# Altium PCB afstandbediening.PcbDoc (part 2 of 2)
Units mm, origin at the board's own origin, x right, y up, seen from the top; angles counter-clockwise.
Board outline 97 x 86 mm, 2 copper layers (Top Layer, Bottom Layer), stack 1.671 mm thick; 45 components, 45 nets, 242 pads, 62 vias.
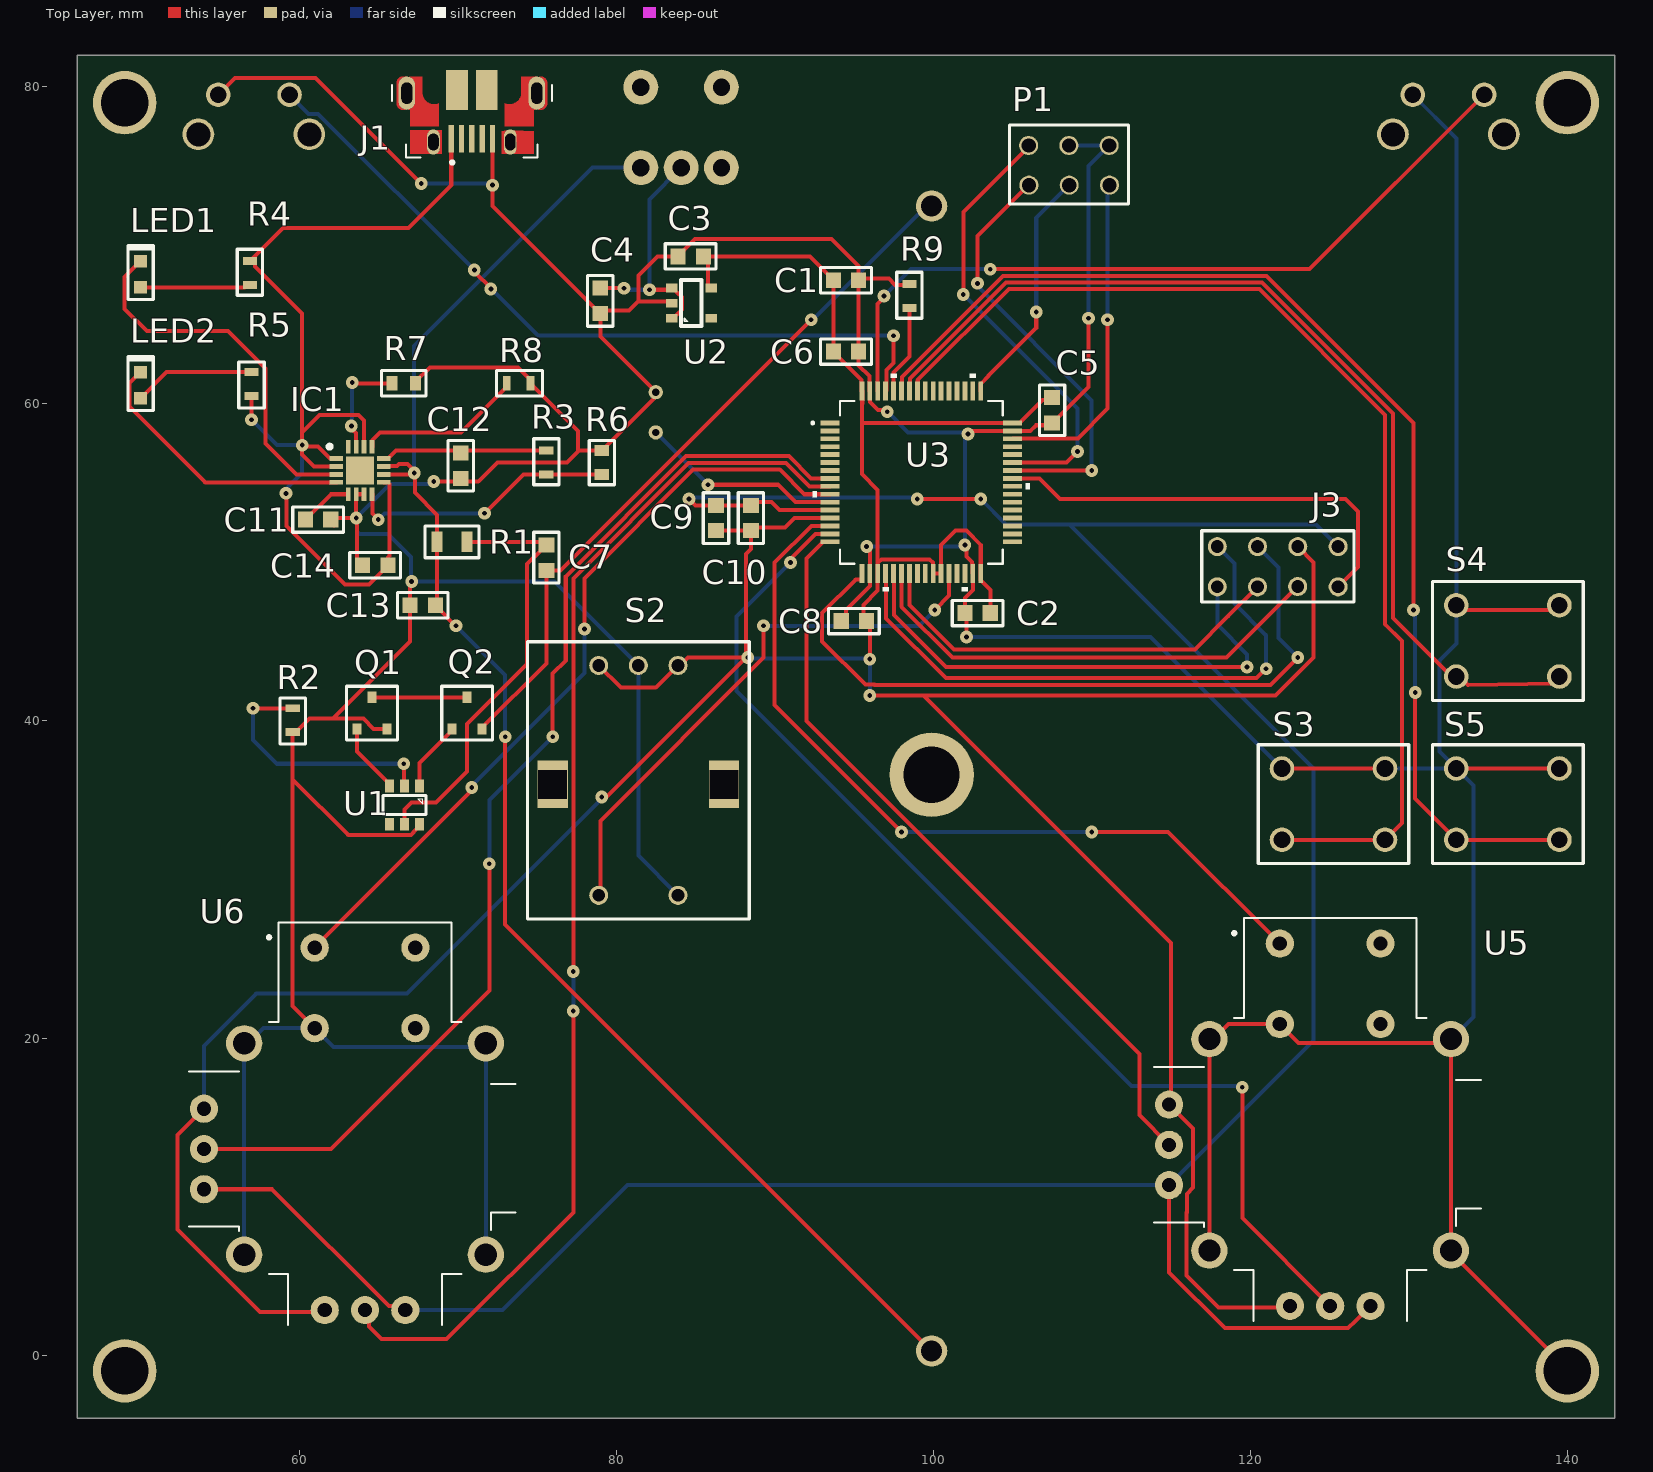
[diagram p0: Top Layer view]

## Part data (continued)
R9: library part ERJ-2RKF4991X, "Res Thick Film 0402 4.99K Ohm 1% 1/10W +/-100ppm/ßC Molded SMD Punched Carrier T/R", Case Code (Imperial)=0402, Case Code (Metric)=1005, Manufacturer=Panasonic, Max Operating Temperature=155°C, Max Power Dissipation=100mW, Min Operating Temperature=-55°C, Package Quantity=1, Resistance=4.99kR, Resistance Tolerance=1%, Resistor Type="Thick Film", Supplier Part Number 1=2059145, Temperature Coefficient=100ppm/°C, Voltage Rating=50V, Case/Package=0402, Category="Chip SMD Resistors", ComponentLink1Description=https://datasheet.ciiva.com/16773/70260748-16773110.pdf?src-supplier=Allied+Electronics, ComponentLink1URL=https://datasheet.ciiva.com/16773/70260748-16773110.pdf?src-supplier=Allied+Electronics, ComponentLink2Description=https://datasheet.ciiva.com/22749/1678782-22749654.pdf?src-supplier=Element14, ComponentLink2URL=https://datasheet.ciiva.com/22749/1678782-22749654.pdf?src-supplier=Element14, ComponentLink3Description=https://datasheet.ciiva.com/24158/aoa0000ce2-24158871.pdf?src-supplier=Mouser, ComponentLink3URL=https://datasheet.ciiva.com/24158/aoa0000ce2-24158871.pdf?src-supplier=Mouser, ComponentLink4Description=https://datasheet.ciiva.com/46388/426256-46388311.pdf?src-supplier=Element14, ComponentLink4URL=https://datasheet.ciiva.com/46388/426256-46388311.pdf?src-supplier=Element14, ComponentLink5Description=https://datasheet.ciiva.com/16199/aoa0000ce2-16199546.pdf?src-supplier=Future+Electronics, ComponentLink5URL=https://datasheet.ciiva.com/16199/aoa0000ce2-16199546.pdf?src-supplier=Future+Electronics, ComponentLink6Description=https://datasheet.ciiva.com/16775/70260748-16775018.pdf?src-supplier=Allied+Electronics, ComponentLink6URL=https://datasheet.ciiva.com/16775/70260748-16775018.pdf?src-supplier=Allied+Electronics, ComponentLink7Description=https://datasheet.ciiva.com/46376/426256-46376955.pdf?src-supplier=Element14, ComponentLink7URL=https://datasheet.ciiva.com/46376/426256-46376955.pdf?src-supplier=Element14, ComponentLink8Description=https://datasheet.ciiva.com/48530/aoa0000ce2-48530971.pdf?src-supplier=Avnet, ComponentLink8URL=https://datasheet.ciiva.com/48530/aoa0000ce2-48530971.pdf?src-supplier=Avnet, Construction=Rectangular, Contact Plating=Tin, Depth=0.5mm, Features="Automotive AEC-Q200", Height=0.016inch, Lead Free="Lead Free", Length=1mm, Manufacturer Part Number=ERJ-2RKF4991X, Military Standard=Not, Mount="Surface Mount", Number of Terminations=2, Packaging="Tape and Reel", Power Rating=100mW, Pricing 1="10=0.01960, 100=0.00930, 500=0.00630, 2500=0.00570, 5000=0.00530, 10000=0.00490, 50000=0.00440 (EUR)", Radiation Hardening=No, REACH SVHC="No SVHC", RoHS=Yes, RoHS Compliant=Yes, Series=ERJ, Stock 1=164767, Supplier 1=Farnell, Technology="THICK FILM", Termination=SMD/SMT, Tolerance=1%, Voltage Rating (DC)=50V, Weight=2.8E-05oz, Width=0.02inch, Working Voltage=50V
S1: library part T101MH9ABE, "SWITCH TOGGLE SPDT 0.4VA 20V", Actuator Color=Chrome, Contact Current Rating=400mA, Contact Resistance=20mR, Current Rating=20mA, Manufacturer="ITT C&K", Max Operating Temperature=85°C, Max Voltage Rating (AC)=20V, Min Operating Temperature=-30°C, Package Quantity=1, Power Rating=400mW, Supplier Part Number 1=9575685, Actuator Length=5.33mm, Actuator Material=Brass,Chrome, Actuator Type="Standard Round", Category="Toggle Switches", ComponentLink1Description=https://datasheet.ciiva.com/7986/49548-7986817.pdf?src-supplier=Element14, ComponentLink1URL=https://datasheet.ciiva.com/7986/49548-7986817.pdf?src-supplier=Element14, ComponentLink2Description=https://datasheet.ciiva.com/19467/595956-19467316.pdf?src-supplier=Jameco, ComponentLink2URL=https://datasheet.ciiva.com/19467/595956-19467316.pdf?src-supplier=Jameco, ComponentLink3Description=https://datasheet.ciiva.com/18143/getdatasheetpartid-116123-18143142.pdf?src-supplier=Verical, ComponentLink3URL=https://datasheet.ciiva.com/18143/getdatasheetpartid-116123-18143142.pdf?src-supplier=Verical, ComponentLink4Description=https://datasheet.ciiva.com/2906/t-toggle-29jul14-2906940.pdf?src-supplier=Digi-Key, ComponentLink4URL=https://datasheet.ciiva.com/2906/t-toggle-29jul14-2906940.pdf?src-supplier=Digi-Key, ComponentLink5Description=https://datasheet.ciiva.com/7986/1695318-7986815.pdf?src-supplier=Element14, ComponentLink5URL=https://datasheet.ciiva.com/7986/1695318-7986815.pdf?src-supplier=Element14, Contact Material="Gold,Copper Alloy", Contact Plating=Gold,Nickel, Electrical Life=60000Cycles, Height=5mm, Housing Material="Stainless Steel", Illumination Type=Non-Illuminated,Illuminated, Lead Free="Lead Free", Length=8.13mm, Manufacturer Part Number=T101MH9ABE, Max Voltage Rating (DC)=20V, Mount="Through Hole,Brackets,PCB", Number of Poles=1, Orientation="Right Angle", Packaging=Bulk, Pricing 1="1=5.00000, 5=4.75000, 10=4.50000, 20=4.30000, 50=4.09000 (EUR)", Radiation Hardening=No, REACH SVHC="No SVHC", RoHS=Yes, RoHS Compliant=Yes, Series=T, Stock 1=304, Supplier 1=Farnell, Switch Function=On-On, Termination="PC Pins", Throw Configuration=SPDT, Voltage Rating (AC)=20V, Voltage Rating (DC)=20V, Width=8.1mm
S2: library part EC11E15244B2, "ALPS - EC11E15244B2 - ENCODER, VERTICAL, 11MM, 30DET,15PPR", Case/Package=Metal, Manufacturer="Alps Electric", Max Operating Temperature=85°C, Max Supply Voltage (AC)=5V, Min Operating Temperature=-40°C, Package Quantity=1200, Supplier Part Number 1=2064991, Built in Switch=Yes, Category=Encoders, ComponentLink1Description=https://datasheet.ciiva.com/11807/0900766b80f4c221-11807911.pdf?src-supplier=RSComponents, ComponentLink1URL=https://datasheet.ciiva.com/11807/0900766b80f4c221-11807911.pdf?src-supplier=RSComponents, ComponentLink2Description=https://datasheet.ciiva.com/18154/getdatasheetpartid-652491-18154142.pdf?src-supplier=Verical, ComponentLink2URL=https://datasheet.ciiva.com/18154/getdatasheetpartid-652491-18154142.pdf?src-supplier=Verical, ComponentLink3Description=https://datasheet.ciiva.com/1310/1702859-1310642.pdf?src-supplier=Element14, ComponentLink3URL=https://datasheet.ciiva.com/1310/1702859-1310642.pdf?src-supplier=Element14, Hole Diameter=1.5mm, Manufacturer Part Number=EC11E15244B2, Mount="Through Hole", Nominal Supply Voltage (DC)=5V, Number of Channels=2, Number of Pins=5, Packaging=Tray, Pricing 1="1=4.11000, 5=3.45000, 10=3.19000, 20=2.97000, 50=2.83000 (EUR)", Pulses per Revolution=15, Radiation Hardening=No, RoHS=Yes, RoHS Compliant=Yes, Stock 1=1927, Supplier 1=Farnell, Termination="Through Hole"
S3 S4 S5: library part B3F-1070, "Switch Tactile N.O. SPST Flat Plunger PC Pins 0.05A 24VDC 0.98N Thru-Hole Bag", Actuator Color=Black, Contact Current Rating=50mA, Contact Resistance=100mR, Insulation Resistance=100MR, Manufacturer=Omron, Max Operating Temperature=70°C, Max Voltage Rating (DC)=24V, Min Operating Temperature=-25°C, Operating Force=0.98N, Package Quantity=1000, Supplier Part Number 1=959698, Actuator Length=6.1mm, Actuator Type=Standard, Category="Tactile Switches", ComponentLink1Description=https://datasheet.ciiva.com/14540/70175474-14540918.pdf?src-supplier=Allied+Electronics, ComponentLink1URL=https://datasheet.ciiva.com/14540/70175474-14540918.pdf?src-supplier=Allied+Electronics, ComponentLink2Description=https://datasheet.ciiva.com/2899/en-b3f-2899915.pdf?src-supplier=Digi-Key, ComponentLink2URL=https://datasheet.ciiva.com/2899/en-b3f-2899915.pdf?src-supplier=Digi-Key, ComponentLink3Description=https://datasheet.ciiva.com/14142/b3f-eng-datasheet-14142459.pdf?src-supplier=Distrelec, ComponentLink3URL=https://datasheet.ciiva.com/14142/b3f-eng-datasheet-14142459.pdf?src-supplier=Distrelec, ComponentLink4Description=https://datasheet.ciiva.com/26827/getdatasheetpartid-388866-26827340.pdf?src-supplier=Verical, ComponentLink4URL=https://datasheet.ciiva.com/26827/getdatasheetpartid-388866-26827340.pdf?src-supplier=Verical, ComponentLink5Description=https://datasheet.ciiva.com/20148/78-0136-20148405.pdf?src-supplier=Rapid+Electronics, ComponentLink5URL=https://datasheet.ciiva.com/20148/78-0136-20148405.pdf?src-supplier=Rapid+Electronics, ComponentLink6Description=https://datasheet.ciiva.com/16154/en-b3f-16154903.pdf?src-supplier=Onlinecomponents.com, ComponentLink6URL=https://datasheet.ciiva.com/16154/en-b3f-16154903.pdf?src-supplier=Onlinecomponents.com, ComponentLink7Description=https://datasheet.ciiva.com/5283/b3f-0811-26083-5283693.pdf?src-supplier=Mouser, ComponentLink7URL=https://datasheet.ciiva.com/5283/b3f-0811-26083-5283693.pdf?src-supplier=Mouser, ComponentLink8Description=https://datasheet.ciiva.com/15183/getdatasheetpartid-153449-15183757.pdf?src-supplier=Verical, ComponentLink8URL=https://datasheet.ciiva.com/15183/getdatasheetpartid-153449-15183757.pdf?src-supplier=Verical, Contact Material=Gold,Silver, Contact Plating=Silver,Gold, Current Rating=50mA, Depth=7.7mm, Electrical Life=1000000Cycles, Illumination Type=Non-Illuminated,Illuminated, Lead Free="Lead Free", Length=6mm, Manufacturer Part Number=B3F-1070, Max Current Rating=50mA, Mechanical Life=500000Cycles, Mount="Through Hole", Number of Poles=1, Orientation=Straight, Packaging=Bulk, Pricing 1="10=0.28600, 50=0.25600, 100=0.22600, 500=0.20900 (EUR)", REACH SVHC=Unknown, RoHS=Yes, RoHS Compliant=Yes, Series=B3F, Stock 1=5378, Supplier 1=Farnell, Switch Function=Off-Mom, Switch Travel=0.25mm, Termination="PC Pins", Throw Configuration=SPST, Voltage Rating (DC)=24V, Weight=0.25g
S6 S7: library part B3F-3120, "OMRON ELECTRONIC COMPONENTS         B3F3120            Tactile Switch, Non Illuminated, 0.98 N, 24 V, 50 mA, Solder, B3F Series", Actuator Color=Black, Contact Current Rating=50mA, Contact Resistance=100mR, Manufacturer=Omron, Max Operating Temperature=70°C, Max Voltage Rating (DC)=24V, Min Operating Temperature=-25°C, Operating Force=0.98N, Package Quantity=1000, Ratings=IP00, Supplier Part Number 1=1608275, Actuator Length=1.6mm, Actuator Type=Standard, Category="Keylock Switches", ComponentLink1Description=https://datasheet.ciiva.com/26883/getdatasheetpartid-569160-26883377.pdf?src-supplier=Verical, ComponentLink1URL=https://datasheet.ciiva.com/26883/getdatasheetpartid-569160-26883377.pdf?src-supplier=Verical, ComponentLink2Description=https://datasheet.ciiva.com/2900/b3f-0811-2900017.pdf?src-supplier=Digi-Key, ComponentLink2URL=https://datasheet.ciiva.com/2900/b3f-0811-2900017.pdf?src-supplier=Digi-Key, ComponentLink3Description=https://datasheet.ciiva.com/30263/en-b3f-30263926.pdf?src-supplier=Onlinecomponents.com, ComponentLink3URL=https://datasheet.ciiva.com/30263/en-b3f-30263926.pdf?src-supplier=Onlinecomponents.com, ComponentLink4Description=https://datasheet.ciiva.com/48509/b3f-48509416.pdf?src-supplier=Distrelec, ComponentLink4URL=https://datasheet.ciiva.com/48509/b3f-48509416.pdf?src-supplier=Distrelec, ComponentLink5Description=https://datasheet.ciiva.com/16154/en-b3f-16154921.pdf?src-supplier=Onlinecomponents.com, ComponentLink5URL=https://datasheet.ciiva.com/16154/en-b3f-16154921.pdf?src-supplier=Onlinecomponents.com, ComponentLink6Description=https://datasheet.ciiva.com/15183/getdatasheetpartid-153427-15183754.pdf?src-supplier=Verical, ComponentLink6URL=https://datasheet.ciiva.com/15183/getdatasheetpartid-153427-15183754.pdf?src-supplier=Verical, ComponentLink7Description=https://datasheet.ciiva.com/1532/611570-1532588.pdf?src-supplier=Element14, ComponentLink7URL=https://datasheet.ciiva.com/1532/611570-1532588.pdf?src-supplier=Element14, ComponentLink8Description=https://datasheet.ciiva.com/16859/70175475-16859533.pdf?src-supplier=Allied+Electronics, ComponentLink8URL=https://datasheet.ciiva.com/16859/70175475-16859533.pdf?src-supplier=Allied+Electronics, Contact Material=Gold,Silver, Contact Plating=Gold, Contact Type="1 maker", Current Rating=50mA, Depth=7.15mm, Electrical Life=1000000Cycles, Height=3.85mm, Illumination Type=Non-Illuminated,Illuminated, Lead Free="Lead Free", Length=7.3mm, Manufacturer Part Number=B3F-3120, Max Current Rating=50mA, Mechanical Life=1000000Cycles, Mount="Through Hole", Number of Poles=1, Orientation="Right Angle", Packaging=Bulk, Pricing 1="10=0.35800, 50=0.32000, 100=0.28200, 500=0.26300 (EUR)", Radiation Hardening=No, REACH SVHC=Unknown, RoHS=Yes, RoHS Compliant=Yes, Series=B3F, Stock 1=145, Supplier 1=Farnell, Switch Function=Off-Mom, Switch Travel=0.25mm, Termination="PC Pins", Throw Configuration=SPST, Voltage Rating (DC)=24V, Weight=0.25g, Width=6mm
U1: library part AP9101CK6-AETRG1, "IC BATT PROT LI-ION 1-CELL SOT26", Case/Package=SOT-23-6, Manufacturer=Diodes, Max Operating Temperature=85°C, Min Operating Temperature=-40°C, Supplier Part Number 1=621-AP9101CK6-AETRG1, Category="Battery Management", ComponentLink1Description=https://www.diodes.com/assets/Datasheets/AP9101C.pdf?src-supplier=Digi-Key, ComponentLink1URL=https://www.diodes.com/assets/Datasheets/AP9101C.pdf?src-supplier=Digi-Key, Fault Protection="Over Current,Over Voltage", Manufacturer Part Number=AP9101CK6-AETRG1, Number of Cells=1, Pricing 1="1=0.44000, 10=0.32300, 50=0.32300, 100=0.16500, 1000=0.12400, 10000=0.10700 (USD)", RoHS=Yes, RoHS Compliant=Yes, Stock 1=3466, Supplier 1=Mouser
U2: library part NCP164CSN300T1G, "MAX 5V, MIN 1.6V OUTPUT 3V", Manufacturer="ON Semiconductor", Supplier Part Number 1=3463950, Manufacturer Part Number=NCP164CSN300T1G, Pricing 1="1=0.39400, 50=0.32400, 100=0.25600, 250=0.23300, 500=0.22700, 1000=0.19200, 2500=0.17300, 5000=0.16700 (EUR)", RoHS=No, Stock 1=3000, Supplier 1=Farnell
U3: "No Description Available", Built_By=EMA_UL_Team, Copyright="Copyright (C) 2018 Accelerated Designs. All rights reserved", Manufacturer_Part_Number=STM32F303R8T6, RefDes=RefDes, SourceLibrary=Updates_to_database_2020-10-19, Type=DEV, Vendor=STMicroelectronics
U4: "Undefined or Miscellaneous", Manufacturer_Name="Keystone Electronics", Datasheet Link=http://www.keyelco.com/product-pdf.cfm?p=13958, Height=14mm, Manufacturer_Part_Number=1043P
U5 U6: "Joystick, 2 - Axis Analog _Resistive_ Output", Package="SparkFun Electronics", Availability=Unavailable, MF="SparkFun Electronics", MP=COM-09032, Price=None, SnapEDA_Link=https://www.snapeda.com/parts/COM-09032/SparkFun%20Electronics/view-part/888157/?ref=snap

## Free pads (board coordinates)
  round 4 / inner oval 1.2x0.3 / far side oval 1.2x0.3 hole 3: 2(49,-1) 2(49,79) 2(140,-1)
  round 4 hole 3: 2(140,79)

## Via types
v1: diameter 0.8, hole 0.3, Top Layer to Bottom Layer, 62 vias

## Nets (pads, with @x,y where several pads share a name; then routed paths per layer and width w, separated by ;. In a path a pad name is that pad's centre, name@x,y a point inside that pad or via, vN(x,y) a via of type N, cw(c..) or ccw(c..) an arc to the next point about the centre after c; other vN are vias at no path point)
GND: C1.1 C2.1 C3.2 C4.2 C5.1 C6.1 C8.1 C11.1 C12.1 C13.1 C14.1 IC1.6 IC1.7 J1.5 J4.2 P1.5 P1.6 pad.2@140,-1 Q1.2 R2.1 R6.1 R7.2 R8.1 R9.1 S2.3 S2.4 S3.3 S3.4 S4.3 S4.4 S5.3 S5.4 S6.1 S7.1 U1.6 U2.2 U3.18 U3.31 U3.47 U3.63 U5.B2A U5.S1 U5.S2 U5.S3 U5.S4 U6.B2A U6.S1 U6.S2 U6.S3 U6.S4 | length 468.8
  Top Layer w0.254: S6.1 55.97,80.57 61.03,80.57 v1(67.7,73.9) ; U6.B2A 59.6,22.005 59.6,36.3 ; C11.1@62.2,52.325 62.2,52.8 v1(63.6,52.8) ; v1@63.6,52.809 v1(63.6,52.8) ; v1@63.6,52.905 IC1.6 IC1.7 64.077,54.277 IC1.7@64.077,54.002 ; C14.1 63.652,50.173 63.652,52.748 v1(63.6,52.8) ; Q1.2 64.707,39.492 64.052,40.147 62.147,40.147 ; v1(67.1,48.8) 67,48.7 C13.1 67,45 62.147,40.147 ; R7.2 67.35,61.4 68.25,62.3 73.8,62.3 74.477,61.623 R8.1@74.6,61.5 ; U1.6 67.6,33.367 67.22,32.987 67.22,32.97 67.047,32.797 63.103,32.797 59.6,36.3 ; v1(68.5,55.1) 70,55.1 C12.1 ; C12.1@70.2,55.1 71.303,55.1 72.503,56.3 76.9,56.3 77.65,57.05 ; J1.5 v1(72.2,73.8) 72.2,72.475 78.975,65.7 C4.2 ; R8.1 77.6,58.3 77.6,57.05 77.65,57.05 ; R6.1@79,57.05 77.65,57.05 ; R6.1 79.2,57.05 79.423,57.273 79.423,57.373 82.376,60.326 82.376,60.616 J4.2 79,64.24 C4.2 ; U2.2 83.405,66.445 81.405,66.445 81.405,66.505 ; C8.1 94.503,46.603 94.503,47.003 96,48.5 U3.18 v1@96,50.657 ; v1(97.108,59.508) 97.004,59.613 96.521,59.613 96.025,60.108 96.025,60.775 U3.63 95.975,60.825 95.975,61.744 95.3,62.419 C6.1 C1.1 ; R9.1@98.5,67.5 97.6,67.5 97.2,67.9 95.4,67.9 C1.1 ; v1(102,51.1) 102.1,51 102.1,50.366 102.447,50.019 102.447,49.919 102.475,49.891 102.475,49.325 U3.31 102.5,48.264 102,47.764 C2.1 102.1,46.7 v1(102.1,45.3) ; v1(102.2,58.105) 102.2,58.151 102.349,58.3 U3.47 106.122,58.3 106.474,58.652 107.152,58.652 C5.1@107.4,58.9 ; C5.1 107.525,58.8 109.8,61.075 v1(109.8,65.4) ; U5.S2 U5.S1 117.67,19.927 118.623,20.88 U5.B2A 123.049,19.696 132.428,19.696 U5.S4 U5.S3 132.66,6.466 140,-0.874 pad.2@140,-1 ; S3.4 S3.3 ; S5.4 S5.3 ; S4.4@133,47 S4.3@140,47 ; 59.6,36.3 R2.1 59.8,39.3 60.647,40.147 62.147,40.147 ; C4.2 79.2,65.9 80.8,65.9 81.405,66.505 ; 81.405,66.505 81.405,68.105 82.6,69.3 C3.2 83.9,69.325 84.975,70.4 93.6,70.4 95.3,68.7 95.3,67.9 C1.1
  Bottom Layer w0.254: U6.S2 U6.S1 56.79,19.667 57.743,20.62 U6.B2A 62.169,19.436 71.549,19.436 U6.S4 U6.S3 ; v1(67.7,73.9) 72.1,73.9 v1(72.2,73.8) ; v1@68.274,55.1 68.118,54.944 65.744,54.944 v1(63.6,52.8) 63.664,52.736 63.664,51.949 63.812,51.8 65.6,51.8 67.052,50.348 67.052,48.848 v1(67.1,48.8) 76.1,48.8 S2.3 81.4,31.5 S2.4 ; v1(95.8,51) 101.9,51 v1(102,51.1) 102,57.852 102.2,58.052 v1(102.2,58.105) 102.2,58.2 98.416,58.2 v1(97.108,59.508) ; v1(102.1,45.3) 113.7,45.3 S3.4 ; P1.5 P1.6 109.8,75 v1(109.8,65.4) ; S3.3 S5.4 ; S7.1 133,76.75 S4.4 133,44.888 131.93,43.818 131.93,38.07 S5.4 ; U5.S4 134.07,21.338 134.07,35.93 S5.4
NetC1_2: C1.2 C2.2 C3.1 C5.2 C6.2 C8.2 C9.2 C10.2 J3.7 S2.1 S2.2 U2.5 U3.13 U3.19 U3.26 U3.27 U3.32 U3.48 U3.64 U5.H1 U5.V1 U6.H1 U6.V1 | length 261.3
  Top Layer w0.254: U6.V1 52.335,13.875 52.335,7.92 57.53,2.725 61.505,2.725 U6.H1 ; S2.2 80.3,42.1 82.5,42.1 S2.1 84.022,43.5 84.522,44 v1@88.2,44 ; v1(79.1,35.2) 79.4,35.2 v1@88.2,44 ; U2.5 85.953,67.3 85.8,67.453 85.8,69 C3.1 92.225,69.3 93.7,67.825 C6.2@93.7,63.325 ; C9.2 C10.2@88.3,52 ; v1(88.295,44) v1@88.2,44 ; U3.13 91.264,52.8 90.664,52.2 88.5,52.2 C10.2@88.3,52 ; C6.2@93.7,63.275 95.475,61.5 95.475,60.825 U3.64 ; C6.2 C6.2@93.7,63.325 ; C1.2 C6.2@93.7,63.325 ; 95.525,60.011 95.525,60.775 U3.64 ; C8.2@95.6,46.3 95.6,47.314 96.5,48.214 U3.19 96.5,54.563 95.5,55.563 95.5,58.7 ; C8.2 96,46.1 v1(96,43.9) ; v1(96,41.6) 99.4,41.6 ; 96.553,50.019 96.725,50.192 99.775,50.192 99.975,49.992 99.975,49.325 U3.26 U3.27 100.5,51.1 101.4,52 102.1,52 103,51.1 U3.32 103,48.906 102.975,48.881 103.6,48.256 C2.2 ; C5.2@107.5,60.6 107.152,60.252 106.896,60.252 105.444,58.8 U3.48 95.6,58.8 95.5,58.7 ; U5.H1 122.4,3 118,3 115.982,5.018 115.982,8.982 116,9 116,10.166 116.4,10.566 116.4,14.28 U5.V1 115,15.92 115,26 99.4,41.6 ; J3.7 124,50 124,44 121.6,41.6 99.4,41.6 ; v1@88.2,44 88.2,50.545 88.5,50.845 C10.2 C10.2@88.3,52 ; 95.5,58.7 U3.64
  Bottom Layer w0.254: U6.V1 54,19.5 57.3,22.8 66.8,22.8 v1@78.896,34.896 ; S2.1 S2.1@84.022,43.5 ; v1(88.295,44) 88.4,44 88.45,43.95 95.95,43.95 v1(96,43.9) v1(96,41.6)
NetC4_1: C4.1 S1.2 U2.1 U2.3 | length 15.8
  Top Layer w0.254: C4.1@78.975,67.3 C4.1 v1(80.5,67.3) ; v1(82.1,67.2) 83.3,67.2 83.49,67.39 83.948,66.932 83.975,66.932 84.155,66.752 84.155,65.948 83.982,65.775 83.955,65.775 83.58,65.4 U2.1
  Bottom Layer w0.254: v1(80.5,67.3) 80.6,67.2 v1(82.1,67.2) 82.1,72.9 S1.2
NetC7_1: C7.1 Q2.2 U4.2 | length 45.5
  Top Layer w0.254: Q2.2 71.55,39.572 75.6,43.622 C7.1 76.5,49.5 v1(92.3,65.3)
  Bottom Layer w0.254: v1(92.3,65.3) 92.4,65.3 99.58,72.48 U4.2
NetC7_2: C7.2 R1.1 U1.5 | length 27.3
  Top Layer w0.254: U1.5 66.65,34.4 67.1,34.85 68.65,34.85 70.6,36.8 70.6,39.8 74.386,43.586 74.386,49.886 75.227,50.727 75.227,50.752 75.575,51.1 C7.2 75.4,51.3 R1.1
NetC9_1: C9.1 C10.1 J3.8 U3.12 U5.H3 U5.V3 U6.H3 U6.V3 | length 190.9
  Top Layer w0.254: U6.V3 58.295,10.46 65.663,3.092 66.448,3.092 U6.H3 ; v1(84.6,54) 85,53.6 C9.1 C10.1 ; C10.1@88.5,53.8 89.794,53.8 90.294,53.3 U3.12 ; v1(99,54) v1(103,54) ; U5.V3 114.88,5.22 118.4,1.7 126.18,1.7 126.644,2.164 U5.H3
  Bottom Layer w0.254: U6.H3 72.84,2.84 80.72,10.72 U5.V3 124,19.84 124,37 117.565,43.435 108.6,52.4 ; v1(84.6,54) 84.7,54.1 98.9,54.1 v1(99,54) ; v1(103,54) 104.6,52.4 108.6,52.4 ; J3.8 124.14,52.4 108.6,52.4
NetC11_2: C11.2 IC1.5 | length 3.4
  Top Layer w0.254: C11.2 62,54.3 62.575,54.3 IC1.5
NetC12_2: C12.2 IC1.12 R3.1 | length 10.5
  Top Layer w0.254: IC1.12 65.625,56.55 66.125,57.05 69.25,57.05 69.75,57.05 70.2,57.05 R3.1
NetC13_2: C13.2 IC1.10 IC1.11 R1.2 S1.1 U4.1 | length 100.2
  Top Layer w0.254: IC1.10 67.172,55.55 v1(67.261,55.639) ; IC1.11 65.373,56.073 66.173,56.073 66.3,56.2 66.848,56.2 67.261,55.787 v1(67.261,55.639) ; v1(69.9,46) 69.875,46 68.6,47.275 C13.2 68.7,47.4 R1.2 68.7,53 67.3,54.4 67.3,55.6 v1(67.261,55.639) ; v1(73,39) 73,27.16 U4.1
  Bottom Layer w0.254: v1(67.261,55.639) 67.261,63.661 78.5,74.9 S1.1 ; v1(69.9,46) 73,42.9 v1(73,39)
NetC14_2: C14.2 IC1.1 IC1.2 IC1.9 IC1.14 J1.1 R4.1 R5.1 | length 67.1
  Top Layer w0.254: v1(57,59) R5.1 ; v1@59.09,54.628 59.09,54.437 v1(59.173,54.355) ; v1@59.2,54.355 59.2,52.308 62.908,48.6 64.4,48.6 65.6,49.8 C14.2 ; IC1.2 60.95,56.05 60.2,56.8 60.2,57.3 v1(60.2,57.4) ; IC1.1 62.327,56.573 61.927,56.573 61.2,57.3 60.3,57.3 v1(60.2,57.4) ; IC1.14 64.1,58.951 63.751,59.3 61.3,59.3 60.2,58.2 ; IC1.9 65.577,55.05 65.695,54.932 65.695,50.395 C14.2@65.6,50.3 ; J1.1 69.6,73.8 66.9,71.1 59,71.1 R4.1 57.1,69 57.223,68.877 57.223,68.677 60.2,65.7 60.2,58.2 ; v1(60.2,57.4) 60.2,58.2
  Bottom Layer w0.254: v1(57,59) 58.6,57.4 v1(60.2,57.4) 60.2,55.65 59.173,54.623 v1(59.173,54.355)
NetIC1_3: IC1.3 LED1.1 | length 23.9
  Top Layer w0.254: LED1.1 49,68 49,66 50.4,64.6 55.517,64.6 57.894,62.223 57.894,57.506 59.85,55.55 IC1.3
NetIC1_4: IC1.4 LED2.1 | length 17.6
  Top Layer w0.254: LED2.1@50.069,61.931 LED2.1 49.305,61.305 49.305,59.828 54.083,55.05 IC1.4
NetIC1_8: IC1.8 R3.2 R6.2 | length 17
  Top Layer w0.254: IC1.8 64.623,54.277 64.623,53.077 v1(65,52.7) ; v1(71.7,53.1) 74.15,55.55 R3.2 R6.2
  Bottom Layer w0.254: v1(65,52.7) 65.4,53.1 v1(71.7,53.1)
NetIC1_13: IC1.13 R8.2 | length 10.5
  Top Layer w0.254: IC1.13 64.623,57.323 64.623,57.723 65.1,58.2 70.2,58.2 72.977,60.977 73.1,61.1 R8.2
NetIC1_15: IC1.15 R7.1 | length 6.7
  Top Layer w0.254: v1(63.3,58.6) 63.3,58.452 63.6,58.152 IC1.15 ; v1(63.35,61.35) 63.4,61.3 R7.1
  Bottom Layer w0.254: v1(63.3,58.6) 63.35,58.65 v1(63.35,61.35)
NetJ3_1: J3.1 U3.41 | length 27.9
  Top Layer w0.254: U3.41 106.7,55.3 108,54 126,54 126.8,53.2 126.8,49.72 J3.1
NetJ3_2: J3.2 U3.22 | length 30.3
  Top Layer w0.254: U3.22 98,47.203 101.203,44 118.51,44 J3.2
NetJ3_3: J3.3 U3.23 | length 26.8
  Top Layer w0.254: U3.23 98.5,47.3 101.3,44.5 116.5,44.5 118.58,46.58 J3.3
NetJ3_4: J3.4 U3.21 | length 32.1
  Top Layer w0.254: U3.21 97.525,49.275 97.525,46.675 100.8,43.4 v1(119.8,43.4)
  Bottom Layer w0.254: J3.4 117.92,46.08 119.8,44.2 v1(119.8,43.4)
NetJ3_5: J3.5 U3.20 | length 37.6
  Top Layer w0.254: U3.20 97.025,49.275 97.025,46.475 100.795,42.705 120.405,42.705 v1(121,43.3)
  Bottom Layer w0.254: J3.5 119,49.92 119,47.406 121,45.406 v1(121,43.3)
NetJ3_6: J3.6 U3.17 | length 45.4
  Top Layer w0.254: U3.17 95.5,48.941 95.475,48.915 95.115,48.915 93,46.8 93,45.017 95.722,42.295 96.288,42.295 96.305,42.278 121.278,42.278 v1(123,44)
  Bottom Layer w0.254: J3.6 121.768,49.692 121.768,45.232 v1(123,44)
NetJ4_1: J4.1 U3.11 | length 12.8
  Top Layer w0.254: v1(85.8,54.9) 90.206,54.9 91.306,53.8 U3.11
  Bottom Layer w0.254: J4.1 v1(85.8,54.9)
NetLED1_2: LED1.2 R4.2 | length 7
  Top Layer w0.254: LED1.2 56.55,67.35 56.7,67.5 R4.2
NetLED2_2: LED2.2 R5.2 | length 7.7
  Top Layer w0.254: LED2.2 51.65,62 R5.2
NetP1_1: P1.1 U3.46 | length 20.9
  Top Layer w0.254: U3.46 105.025,57.825 109.125,57.825 111,59.7 v1(111,65.3)
  Bottom Layer w0.254: v1(111,65.3) 111,73.7 P1.1@111.1,73.8
NetP1_2: P1.2 U3.49 | length 15.3
  Top Layer w0.254: U3.49 103,61.244 103.5,61.744 103.5,61.8 106.5,64.8 v1(106.5,65.8) ; P1.2 P1.2@108.62,73.8
  Bottom Layer w0.254: v1(106.5,65.8) 106.5,71.74 P1.2@108.56,73.8
NetP1_3: P1.3 U3.42 | length 27.3
  Top Layer w0.254: v1(102.8,67.6) 102.8,70.58 P1.3@106.02,73.8 ; U3.42 v1(110,55.8)
  Bottom Layer w0.254: v1(102.8,67.6) 102.8,67.426 110,60.226 v1(110,55.8)
NetP1_4: P1.4 U3.43 | length 28.4
  Top Layer w0.254: v1(101.9,66.9) 101.9,72.1 106,76.2 P1.4@106,76.3 ; U3.43 108.4,56.3 v1(109.1,57)
  Bottom Layer w0.254: v1(101.9,66.9) 109.1,59.7 v1(109.1,57)
NetQ1_1: Q1.1 U1.3 | length 4.4
  Top Layer w0.254: Q1.1 63.65,38.067 65.7,36.017 U1.3
NetQ1_3: Q1.3 Q2.3 | length 6
  Top Layer w0.254: Q1.3 Q2.3
NetQ2_1: Q2.1 U1.1 | length 4.4
  Top Layer w0.254: U1.1 67.6,37.362 69.65,39.412 Q2.1
NetR2_2: R2.2 U1.2 | length 16.1
  Top Layer w0.254: v1(57.1,40.8) R2.2 ; v1(66.6,37.3) 66.625,37.275 66.625,35.917 U1.2
  Bottom Layer w0.254: v1(57.1,40.8) 57.1,38.8 58.6,37.3 v1(66.6,37.3)
NetR9_2: R9.2 U3.60 | length 5.7
  Top Layer w0.254: U3.60 97.5,61.985 98.5,62.985 R9.2
NetS2_5: S2.5 U3.28 | length 35.6
  Top Layer w0.254: S2.5@78.6,28.8 S2.5@79,28.8 ; S2.5 79,29.1 79,33.7 89.3,44 v1(89.3,46) ; v1(100.1,47.005) 101,47.905 U3.28
  Bottom Layer w0.254: v1(89.3,46) 99.095,46 v1(100.1,47.005)
NetS3_1: S3.1 S3.2 U3.57 | length 70
  Top Layer w0.254: U3.57 99.025,60.825 99.025,61.492 104.768,67.234 120.569,67.234 128.5,59.303 128.5,46.1 129.57,45.03 129.57,33.57 S3.1 S3.2
NetS4_1: S4.1 S4.2 U3.58 | length 62.1
  Top Layer w0.254: U3.58 98.525,60.825 98.525,61.589 104.593,67.656 120.744,67.656 129,59.4 129,46.5 S4.2@133,42.5 ; S4.2@133.4,42.6 133.739,42.261 139.36,42.36 S4.1@139.5,42.5
NetS5_1: S5.1 S5.2 U3.59 | length 73.6
  Top Layer w0.254: U3.59 98.025,60.825 98.025,61.685 104.418,68.078 121.022,68.078 130.3,58.8 v1(130.3,47) ; v1(130.4,41.8) 130.4,35.1 S5.2 S5.1
  Bottom Layer w0.254: v1(130.3,47) 130.4,46.9 v1(130.4,41.8)
NetS6_2: S6.2 U3.61 | length 48.5
  Top Layer w0.254: S6.2 S6.2@59.648,79.252 ; v1(71.059,68.441) 71.1,68.4 71.1,68.3 72.1,67.3 v1(72.1,67.25) ; U3.61 97.053,60.853 97.053,62.134 97.5,62.581 v1(97.5,64.3)
  Bottom Layer w0.254: S6.2 60.605,78.295 61.205,78.295 v1(71.059,68.441) ; v1(72.1,67.25) 72.125,67.25 75.075,64.3 v1(97.5,64.3)
NetS7_2: S7.2 U3.62 | length 49.3
  Top Layer w0.254: U3.62 96.5,66.3 96.9,66.7 v1(96.9,66.8) ; v1(103.6,68.5) 123.75,68.5 S7.2
  Bottom Layer w0.254: v1(96.9,66.8) 98.6,68.5 v1(103.6,68.5)
NetU3_8: U3.8 U6.V2 | length 70.7
  Top Layer w0.254: U6.V2 62,13 72,23 v1(72,31) ; v1(76,39) 76,42.983 76.823,43.806 76.823,49.123 84.4,56.7 90.897,56.7 92.297,55.3 U3.8
  Bottom Layer w0.254: v1(72,31) 72,35 v1(76,39)
NetU3_9: U3.9 U6.H2 | length 77.5
  Top Layer w0.254: U6.H2 64.404,2.596 64.404,1.796 65.2,1 69.3,1 77.3,9 v1(77.3,21.7) ; v1(77.3,24.2) 77.3,49 84.578,56.278 90.722,56.278 92.2,54.8 93.449,54.8 93.475,54.825 U3.9
  Bottom Layer w0.254: v1(77.3,21.7) v1(77.3,24.2)
NetU3_10: U3.10 U6.B1A | length 49.3
  Top Layer w0.254: U6.B1A 70.796,35.511 70.796,35.696 v1(70.9,35.8) ; v1(78,45.8) 78,49 84.856,55.856 90.322,55.856 91.878,54.3 U3.10
  Bottom Layer w0.254: v1(70.9,35.8) 70.9,35.917 78,43.017 v1(78,45.8)
NetU3_14: U3.14 U5.B1A | length 51.5
  Top Layer w0.254: U3.14 92.317,52.3 90,49.983 90,41 v1(98,33) ; v1(110,33) 114.825,33 U5.B1A
  Bottom Layer w0.254: v1(98,33) v1(110,33)
NetU3_15: U3.15 U5.H2 | length 71.3
  Top Layer w0.254: v1(91,50) 91,50.229 92.571,51.8 U3.15 ; v1(119.5,16.9) 119.5,8.64 U5.H2 U5.H2@125.04,3.04
  Bottom Layer w0.254: v1(91,50) 87.6,46.6 87.6,41.9 112.516,16.984 119.416,16.984 v1(119.5,16.9)
NetU3_16: U3.16 U5.V2 | length 48.4
  Top Layer w0.254: U3.16 93.056,51.3 92,50.244 92,40 113,19 113,15.14 U5.V2
pads on no net: IC1.16 IC1.17 J1.2 J1.3 J1.4 J1.P1 J1.P2 J1.P3 J1.P4 J1.P5 J1.P6 S1.3 S1.4 S1.5 S2.6 S2.7 S6.3 S6.4 S7.3 S7.4 U1.4 U2.4 U3.1 U3.2 U3.3 U3.4 U3.5 U3.6 U3.7 U3.24 U3.25 U3.29 U3.30 U3.33 U3.34 U3.35 U3.36 U3.37 U3.38 U3.39 U3.40 U3.44 U3.45 U3.50 U3.51 U3.52 U3.53 U3.54 U3.55 U3.56 U4.3 U5.B1B U5.B2B U6.B1B U6.B2B
copper on no net: | length 0
  Top Layer w0.254: 67.3,25.7 67.335,25.7

## Silkscreen, mask and mechanical layers (free items; w line width, h text height)
board outline:
  lines w0.01: 46,-4 46,32 46,82 143,82 143,68 143,63 143,25 ; 143,25 143,25

## Text inside footprints (layer, text, board x,y; h text height)
J1: Mechanical 13 "PCB EDGE" at 65.2,80.9 h0.61 r180
U3: Mechanical 7 "0.453in/11.5mm" at 107.248,54.732 h0.64; Mechanical 7 "0.453in/11.5mm" at 97.027,46.036 h0.64; Mechanical 7 "0.394in/10.008mm" at 96.71,45.465 h0.64; Mechanical 7 "0.394in/10.008mm" at 85.22,54.732 h0.64